# Altium PCB PCB_SCore-SR1_2024-11-10.pcbdoc
Units mil, origin at the board's own origin, x right, y up, seen from the top; angles counter-clockwise.
Board outline 2600 x 4099.99 mil, 2 copper layers (Top Layer, Bottom Layer); 87 components, 61 nets, 332 pads, 237 vias.
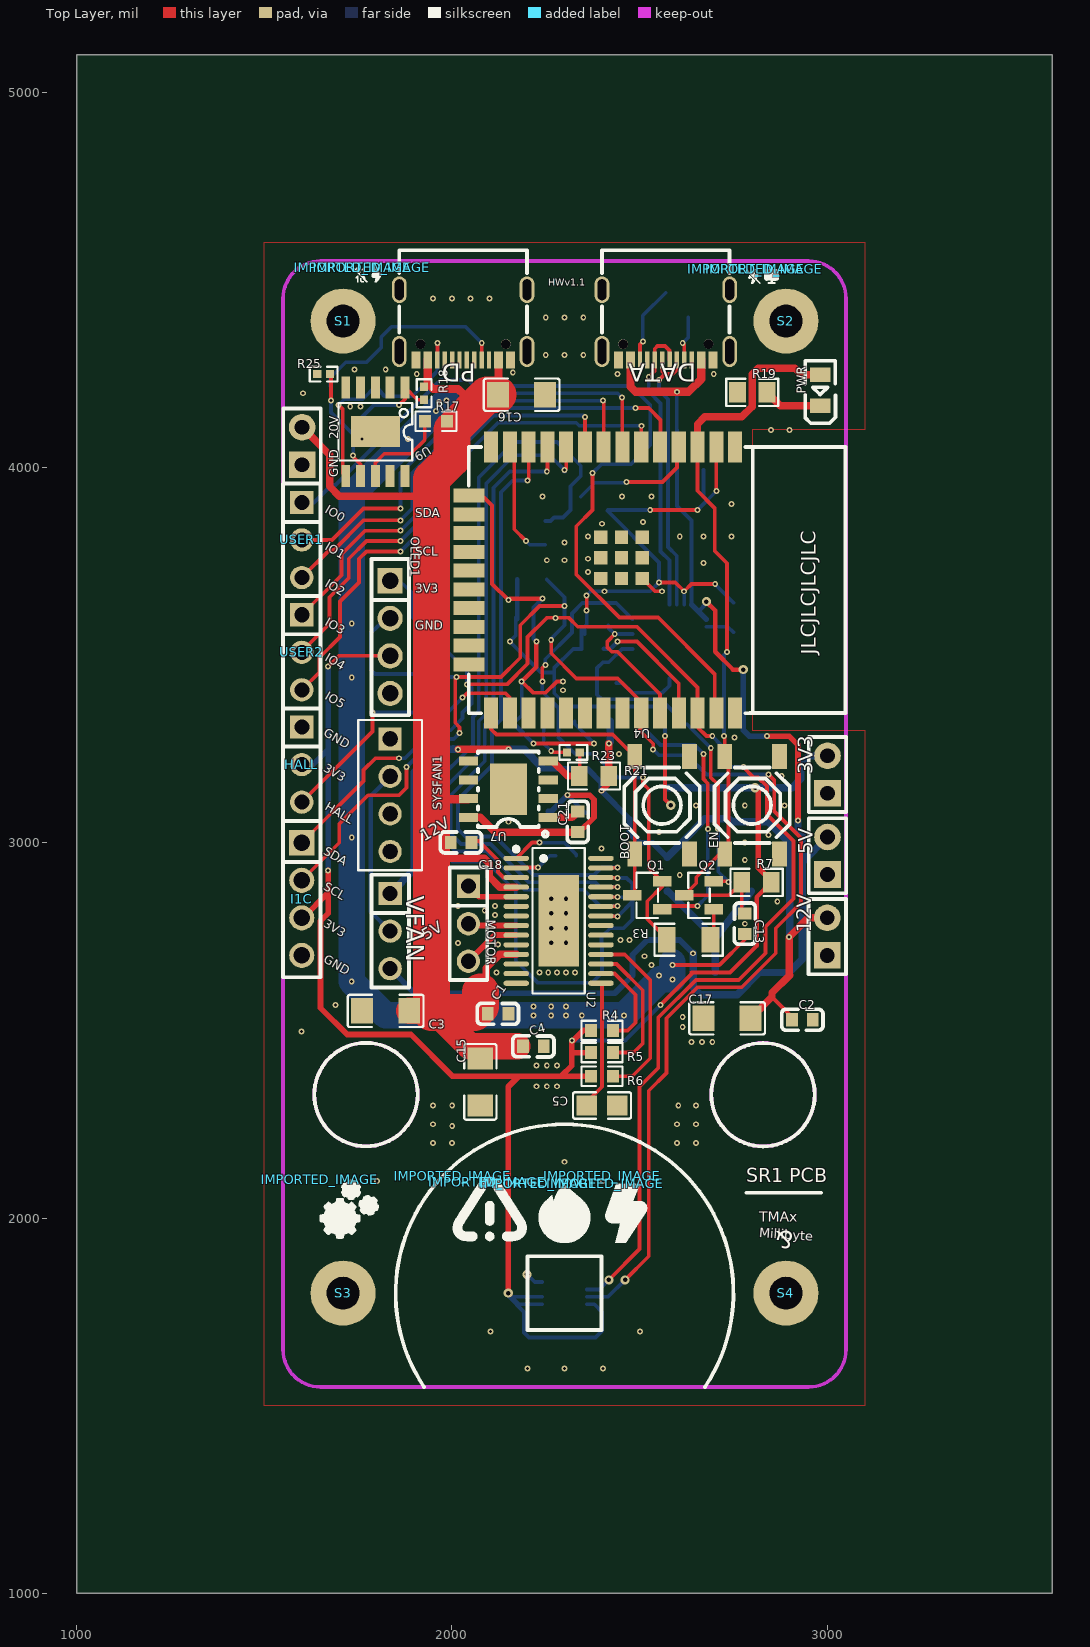
[diagram p0: Top Layer view]
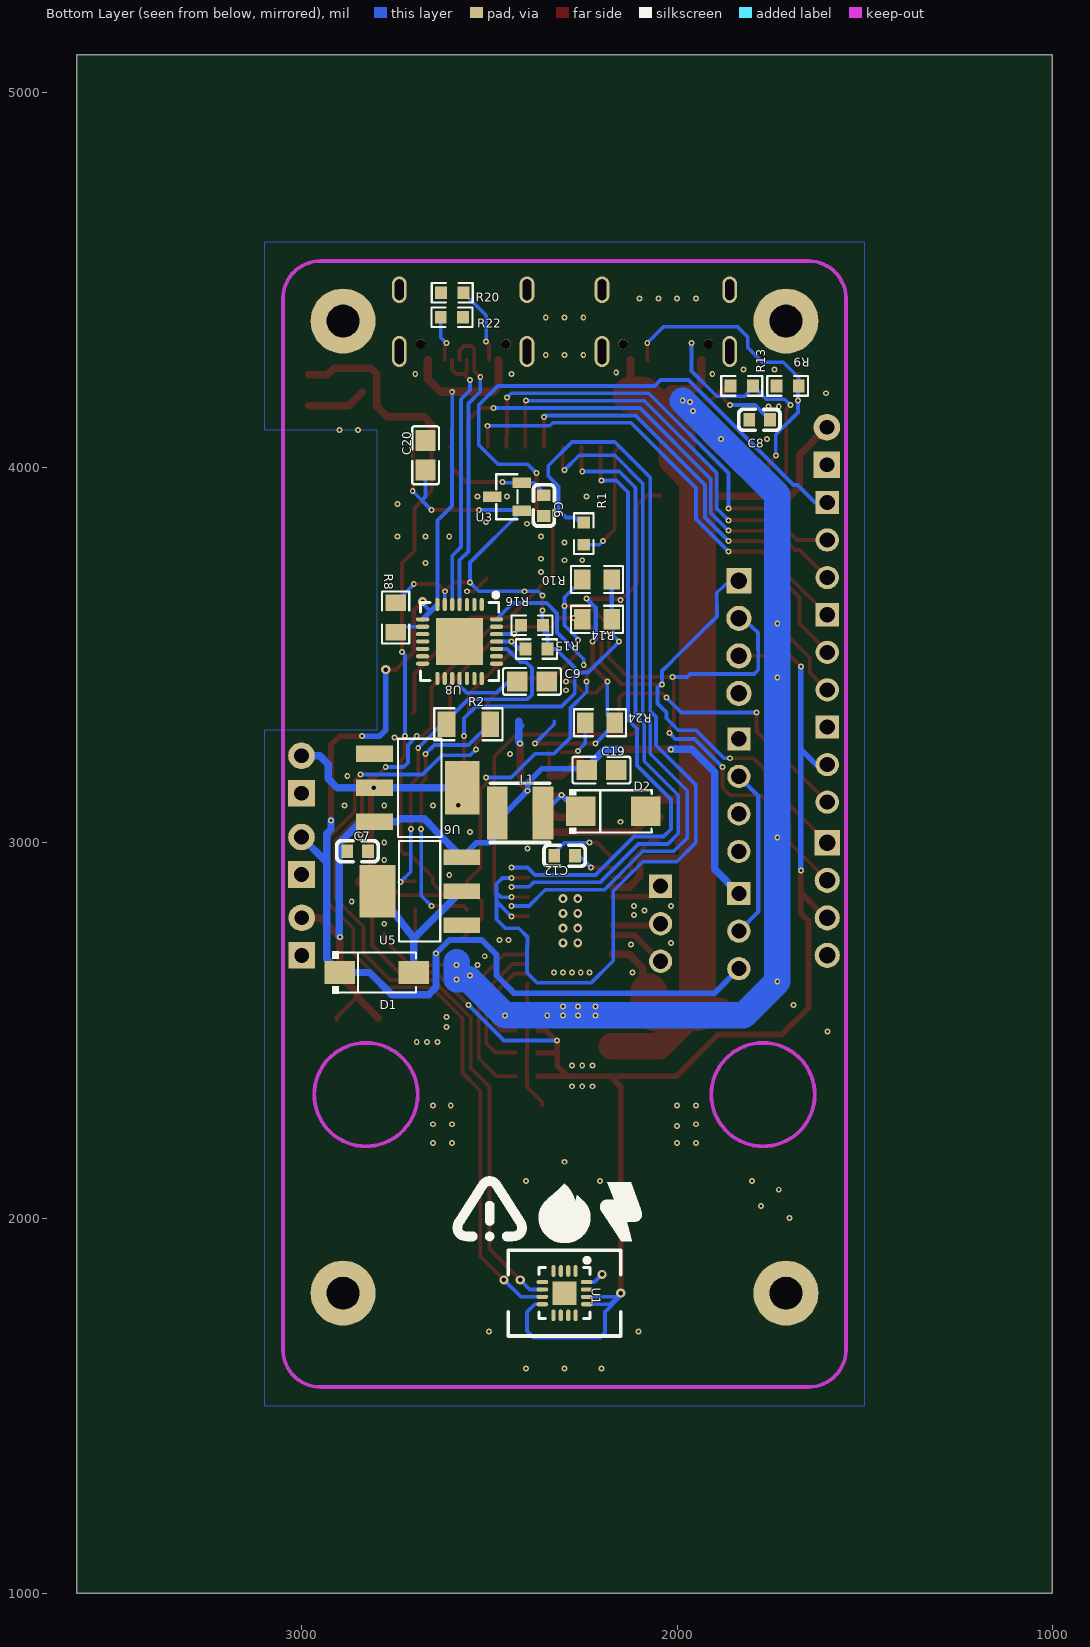
[diagram p1: Bottom Layer view, seen from below]

## Layer stack, top to bottom
Top Layer: signal copper (thickness not stored)
Dielectric: dielectric 12.6, FR-4, Dk 4.8
Bottom Layer: signal copper (thickness not stored)

## Board outline
3600,1000 1000,1000 1000,5099.99 3600,5099.99

## Components (designator, comment, footprint, x,y, rotation, side; value= is the part's Value field where it differs from the comment)
3V3 "3-103336-4" HDR-TH_2P-P2.54-V-M-1 3000.78,3181.89 r90 top
5V "3-103336-4" HDR-TH_2P-P2.54-V-M-1 3000.78,2965.35 r90 top
12V "3-103336-4" HDR-TH_2P-P2.54-V-M-1 3000,2750 r90 top
20V "3-103336-4" HDR-TH_2P-P2.54-V-M-1 1600.8,4057.09 r90 top
BOOT "TS-1187A-B-A-B" SW-SMD_4P-L5.1-W5.1-P3.70-LS6.5-TL-2 2559.84,3100 r90 top
C1 "100nF" C0603#1 2122.83,2544.09 r0 top
C2 "100nF" C0603#1 2933.86,2528.34 r0 top
C3 "100uF" C1206 1823.62,2551.97 r0 top
C4 "1uF" C0603#1 2217.32,2457.48 r0 top
C5 "470nF" C0805#1 2400,2300 r180 top
C6 "100nF" C0603#2 2355.12,3898.42 r90 bottom
C7 "1uF" C0603#2 2851.18,2977.16 r0 bottom
C8 "1uF" C0603#2 1780.31,4126.77 r0 bottom
C9 "4.7uF" C0805#2 2386.61,3429.92 r0 bottom
C12 "100nF" C0603#2 2300,2965.35 r180 bottom
C13 "1uF" C0603#1 2780.31,2784.25 r270 top
C15 "10uF" C1206 2075.59,2362.99 r90 top
C16 "100uF" C1206 2185.82,4193.69 r180 top
C17 "100uF" C1206 2733.07,2532.28 r0 top
C18 "100nF" C0603#1 2024.41,3000.78 r0 top
C19 "4.7uF" C0805#2 2201.57,3193.7 r0 bottom
C20 "4.7uF" C0805#2 2670.08,4032.28 r270 bottom
C21 "100nF" C0603#1 2335.43,3055.9 r90 top
D1 "SS54_C22452" SMA_L4.4-W2.8-LS5.4-R-RD 2800,2654.33 r0 bottom
D2 "SS34" SMA_L4.3-W2.6-LS5.2-RD 2170.08,3083.46 r0 bottom
DATA "HC-TYPE-C-16P-3M2S" USB-C-SMD_HC-TYPE-C-16P-026W 2570,4380 r180 top
EN "TS-1187A-B-A-B" SW-SMD_4P-L5.1-W5.1-P3.70-LS6.5-TL-2 2800,3100 r90 top
HALL "PM2.54-1*3" HDR-TH_3P-P2.54-V-F 1600.01,3208.28 r270 top
I1C "DM254R-11-04-85" HDR-TH_4P-P2.54-V-F 1600,2850 r270 top
IMPORTED_IMAGE "IMPORTED_IMAGE" IMPORTED_IMAGE 2002.27,2111.09 r0 top
IMPORTED_IMAGE "IMPORTED_IMAGE" IMPORTED_IMAGE 2408.57,2091.49 r0 top
IMPORTED_IMAGE "IMPORTED_IMAGE" IMPORTED_IMAGE 2231.01,2091.34 r0 top
IMPORTED_IMAGE "IMPORTED_IMAGE" IMPORTED_IMAGE 2783.58,4528.36 r0 top
IMPORTED_IMAGE "IMPORTED_IMAGE" IMPORTED_IMAGE 1786.08,4532.28 r0 top
IMPORTED_IMAGE "IMPORTED_IMAGE" IMPORTED_IMAGE 2832.06,4528.24 r0 top
IMPORTED_IMAGE "IMPORTED_IMAGE" IMPORTED_IMAGE 1735.74,4532.3 r0 top
IMPORTED_IMAGE "IMPORTED_IMAGE" IMPORTED_IMAGE 1647.72,2102.59 r0 top
IMPORTED_IMAGE "IMPORTED_IMAGE" IMPORTED_IMAGE 2400.88,2111.09 r0 top
IMPORTED_IMAGE "IMPORTED_IMAGE" IMPORTED_IMAGE 2231.01,2091.34 r0 top
IMPORTED_IMAGE "IMPORTED_IMAGE" IMPORTED_IMAGE 2093.61,2095.43 r0 top
L1 "22uH" IND-SMD_L4.0-W4.0_PRS4018 2418.11,3079.52 r0 bottom
MOTOR "PM2.54-1*3" HDR-TH_3P-P2.54-V-F 2044.09,2784.25 r270 top
OLED1 "0.96OLED_4P" HDR-TH_4P-P2.54-V-F-3 1835.43,3548.03 r270 top
PD "HC-TYPE-C-16P-3M2S" USB-C-SMD_HC-TYPE-C-16P-026W 2030,4380 r180 top
PWR "0805G (Green)" LED0805-R-RD 2981.1,4205.51 r90 top
Q1 "SS8050_C2150" SOT-23-3_L2.9-W1.3-P1.90-LS2.4-BR#1 2520.47,2859.84 r0 top
Q2 "SS8050_C2150" SOT-23-3_L2.9-W1.3-P1.90-LS2.4-BR#1 2658.26,2859.84 r0 top
R1 "10kΩ" R0603#1 2248.82,3823.62 r270 bottom
R2 "10kΩ" R1206#1 2555.9,3315.74 r0 bottom
R3 "10kΩ" R1206#2 2630.71,2741.73 r180 top
R4 "10kΩ" R0603#2 2400,2500 r0 top
R5 "10kΩ" R0603#2 2400,2440.94 r0 top
R6 "10kΩ" R0603#2 2400,2377.95 r0 top
R7 "4.7kΩ" R0805#1 2811.81,2894.49 r0 top
R8 "4.7kΩ" R0805#2 2750,3599.99 r90 bottom
R9 "5.1kΩ" R0603#1 1705.51,4217.32 r180 bottom
R10 "4.7kΩ" R0805#2 2213.38,3701.57 r180 bottom
R13 "5.1kΩ" R0603#1 1827.56,4217.32 r180 bottom
R14 "4.7kΩ" R0805#2 2213.38,3595.27 r180 bottom
R15 "10kΩ" R0603#1 2374.8,3516.53 r180 bottom
R16 "10kΩ" R0603#1 2386.61,3579.52 r180 bottom
R17 "10kΩ" R0603#2 1957.48,4122.83 r0 top
R18 "1kΩ" R0402 1925.98,4197.63 r90 top
R19 "330Ω" R0805#1 2800,4199.99 r0 top
R20 "5.1kΩ" R0603#1 2599.21,4465.35 r0 bottom
R21 "10kΩ" R0805#1 2378.74,3177.95 r0 top
R22 "5.1kΩ" R0603#1 2600,4399.99 r0 bottom
R23 "1kΩ" R0402 2323.62,3240.94 r0 top
R24 "120Ω" R0805#2 2205.51,3319.68 r180 bottom
R25 "1kΩ" R0402 1658.27,4248.81 r0 top
S1 "M2 Mounting Screw" MOUNTINGHOLE_2.2MM_M2_PAD 1710,4390 r0 top
S2 "M2 Mounting Screw" MOUNTINGHOLE_2.2MM_M2_PAD 2890,4390 r0 top
S3 "M2 Mounting Screw" MOUNTINGHOLE_2.2MM_M2_PAD 1710,1800 r0 top
S4 "M2 Mounting Screw" MOUNTINGHOLE_2.2MM_M2_PAD 2890,1800 r0 top
SYSFAN1 "molex 4p" MOLEX---47053-1000_MOLEX 1835.43,3126.77 r180 top
U1 "MT6701QT-STD" QFN-16_L3.0-W3.0-P0.50-TL-EP 2300,1800 r90 bottom
U2 "DRV8313PWPR" HTSSOP-28_L9.8-W4.5-P0.65-LS6.6-BL-EP 2284.25,2792.12 r270 top
U3 "TMP236A4DBZR" SOT-23-3_L2.9-W1.3-P1.90-LS2.4-BR#2 2453.54,3922.04 r0 bottom
U4 "ESP32-WROOM-32E(4MB)" WIFI-SMD_ESP32-WROOM-32E 2400,3699.99 r180 top
U5 "AMS1117-5.0" SOT-223_L6.5-W3.5-P2.30-LS7.0-BR 2685.82,2870.86 r0 bottom
U6 "AMS1117-3.3" SOT-223-3_L6.5-W3.4-P2.30-LS7.0-BR 2689.76,3146.45 r180 bottom
U7 "TPS5430DDAR" ESOP-8_L4.9-W3.9-P1.27-LS6.0-TL-EP 2150.39,3142.52 r180 top
U8 "CP2102-GMR" WQFN-28_L5.0-W5.0-P0.50-BL-EP3.2 2579.53,3536.22 r180 bottom
U9 "CH224K" ESSOP-10_L4.9-W3.9-P1.0-LS6.0-TL-EP 1796.06,4095.27 r180 top
USER1 "PM2.54-1*3" HDR-TH_3P-P2.54-V-F 1600.01,3806.7 r270 top
USER2 "PM2.54-1*3" HDR-TH_3P-P2.54-V-F 1600.01,3507.49 r270 top
VFAN "PM2.54-1*3" HDR-TH_3P-P2.54-V-F 1835.43,2764.56 r270 top

## Footprints (in the part's own frame and the unit in brackets; to place one, negate y for a bottom-side part, rotate by r counter-clockwise, add the part's x,y. Pads: shape width x height; smd on the part's side, far side on the other; paste and mask are expansions set on the pad)
C0603#1 [mm]
  rect 0.8x0.9 smd paste+0 mask+0.051: 1(-0.7,0) 2(0.7,0)
  silkscreen extent -1.41,-0.71 1.39,0.72
C0603#2 [mm]
  rect 0.8x0.9 smd paste+0 mask+0.051: 1(0.7,0) 2(-0.7,0)
  silkscreen extent -1.39,-0.72 1.41,0.71
C0805#1 [mm]
  rect 1.41x1.35 smd paste+0 mask+0.051: 1(-1.03,0) 2(1.03,0)
  silkscreen extent -1.96,-0.9 1.96,0.9
C0805#2 [mm]
  rect 1.41x1.35 smd paste-100 mask+0.051: 1(1,0) 2(-1,0)
  silkscreen extent -1.96,-0.9 1.96,0.9
C1206 [mm]
  rect 1.485x1.728 smd paste-100 mask+0.051: 1(-1.593,0) 2(1.593,0)
  silkscreen extent -2.56,-1.09 2.56,1.09
ESOP-8_L4.9-W3.9-P1.27-LS6.0-TL-EP [mm]
  rect 1.3x0.6 smd paste+0 mask+0.051: 1(-2.7,1.905) 2(-2.7,0.635) 3(-2.7,-0.635) 4(-2.7,-1.905) 5(2.7,-1.905) 6(2.7,-0.635) 7(2.7,0.635) 8(2.7,1.905)
  rect 2.5x3.5 smd paste+0 mask+0.051: 9(0,0)
  silkscreen extent -2.67,-2.55 2.05,3.2
ESSOP-10_L4.9-W3.9-P1.0-LS6.0-TL-EP [mm]
  rect 0.6x1.5 smd paste+0 mask+0.05: 1(-2,-3) 2(-1,-3) 3(0,-3) 4(1,-3) 5(2,-3) 6(2,3) 7(1,3) 8(0,3) 9(-1,3) 10(-2,3)
  rect 3.3x2.1 smd paste+0 mask+0.05: 11(0,0)
  silkscreen extent -2.5,-1.95 2.5,1.95
HDR-TH_2P-P2.54-V-M-1 [mm]
  rect 1.8x1.8 hole 1 paste+0 mask+0.051: 1(-1.27,0)
  round 1.8 hole 1 paste+0 mask+0.051: 2(1.27,0)
  silkscreen extent -2.54,-1.27 2.54,1.27
HDR-TH_3P-P2.54-V-F [mil]
  rect 62x62 hole 40.16 paste+0 mask+2: 1(-100,0)
  round 62 hole 40.16 paste+0 mask+2: 2(0,0) 3(100,0)
  silkscreen extent -150,-50 150,50
HDR-TH_4P-P2.54-V-F [mm]
  rect 1.7x1.7 hole 1.1 paste+0 mask+0.051: 1(-3.81,0)
  round 1.7 hole 1.1 paste+0 mask+0.051: 2(-1.27,0) 3(1.27,0) 4(3.81,0)
  silkscreen extent -5.29,-1.27 5.29,1.27
HDR-TH_4P-P2.54-V-F-3 [mm]
  rect 1.7x1.7 hole 1.1 paste+0 mask+0.051: 1(-3.81,0)
  round 1.7 hole 1.1 paste+0 mask+0.051: 2(-1.27,0) 3(1.27,0) 4(3.81,0)
  silkscreen extent -5.29,-1.27 5.29,1.27
HTSSOP-28_L9.8-W4.5-P0.65-LS6.6-BL-EP [mm]
  oval 0.343x1.731 smd paste+0 mask+0.051: 1(-4.225,-2.866) 2(-3.575,-2.866) 3(-2.925,-2.866) 4(-2.275,-2.866) 5(-1.625,-2.866) 6(-0.975,-2.866) 7(-0.325,-2.866) 8(0.325,-2.866) 9(0.975,-2.866) 10(1.625,-2.866) 11(2.275,-2.866) 12(2.925,-2.866) 13(3.575,-2.866) 14(4.225,-2.866) 15(4.225,2.866) 16(3.575,2.866) 17(2.925,2.866) 18(2.275,2.866) 19(1.625,2.866) 20(0.975,2.866) 21(0.325,2.866) 22(-0.325,2.866) 23(-0.975,2.866) 24(-1.625,2.866) 25(-2.275,2.866) 26(-2.925,2.866) 27(-3.575,2.866) 28(-4.225,2.866)
  rect 6.2x2.75 smd paste+0 mask+0.051: 29(0,0)
  silkscreen extent -5,-3.02 4.93,1.77
IMPORTED_IMAGE [mil]
  silkscreen extent 0,-172 197,0
IND-SMD_L4.0-W4.0_PRS4018 [mil]
  rect 55.12x141.73 smd paste+0 mask+2: 1(61,0) 2(-61,0)
  silkscreen extent -79,-79 79,79
LED0805-R-RD [mm]
  rect 1x1.4 smd paste+0 mask+0.051: 1(1.05,0) 2(-1.05,0)
  silkscreen extent -2.22,-1.04 1.99,1.01
MOLEX---47053-1000_MOLEX [mil]
  rect 61.81x61.81 hole 40.16 slot 40.36 at 0 deg paste+0 mask+2: 1(0,-150)
  round 61.81 hole 40.16 slot 40.36 at 0 deg paste+0 mask+2: 2(0,-50) 3(0,50) 4(0,150)
  silkscreen extent -85,-200 85,200
MOUNTINGHOLE_2.2MM_M2_PAD [mm]
  round 4.4 hole 2.2 slot 2.205 at 0 deg paste+0 mask+0.102: 1(0,0)
QFN-16_L3.0-W3.0-P0.50-TL-EP [mm]
  oval 0.8x0.28 smd paste+0 mask+0.051: 1(1.5,-0.75) 2(1.5,-0.25) 3(1.5,0.25) 4(1.5,0.75) 9(-1.5,0.75) 10(-1.5,0.25) 11(-1.5,-0.25) 12(-1.5,-0.75)
  oval 0.28x0.8 smd paste+0 mask+0.051: 5(0.75,1.5) 6(0.25,1.5) 7(-0.25,1.5) 8(-0.75,1.5) 13(-0.75,-1.5) 14(-0.25,-1.5) 15(0.25,-1.5) 16(0.75,-1.5)
  rect 1.6x1.6 smd paste+0 mask+0.051: 17(0,0)
  silkscreen extent -1.72,-1.72 2.38,1.72
R0402 [mm]
  rect 0.566x0.54 smd paste-100 mask+0.051: 1(-0.433,0) 2(0.433,0)
  silkscreen extent -0.94,-0.5 0.94,0.5
R0603#1 [mil]
  rect 31.75x34.02 smd paste-3937.01 mask+2: 1(29.66,0) 2(-29.65,0)
  silkscreen extent -55,-26 55,26
R0603#2 [mil]
  rect 31.75x34.02 smd paste-3937.01 mask+2: 1(-29.66,0) 2(29.65,0)
  silkscreen extent -55,-26 55,26
R0805#1 [mil]
  rect 44.59x54.21 smd paste-3937.01 mask+2: 1(-39.37,0) 2(39.37,0)
  silkscreen extent -69,-36 69,36
R0805#2 [mil]
  rect 44.59x54.21 smd paste-3937.01 mask+2: 1(39.37,0) 2(-39.37,0)
  silkscreen extent -69,-36 69,36
R1206#1 [mil]
  rect 47.54x66.97 smd paste-3937.01 mask+2: 1(58.22,0) 2(-58.22,0)
  silkscreen extent -91,-42 91,42
R1206#2 [mil]
  rect 47.54x66.97 smd paste-3937.01 mask+2: 1(-58.22,0) 2(58.22,0)
  silkscreen extent -91,-42 91,42
SMA_L4.3-W2.6-LS5.2-RD [mm]
  rect 2x2 smd paste+0 mask+0.051: 1(2.2,0) 2(-2.2,0)
  silkscreen extent -2.6,-1.5 2.98,1.5
SMA_L4.4-W2.8-LS5.4-R-RD [mil]
  rect 81.2x60.59 smd paste+0 mask+2: 1(-98.57,0) 2(98.57,0)
  silkscreen extent -104,-56 119,56
SOT-23-3_L2.9-W1.3-P1.90-LS2.4-BR#1 [mm]
  rect 1.25x0.7 smd paste+0 mask+0.051: 1(1,-0.95) 2(1,0.95) 3(-1,0)
  silkscreen extent -0.73,-1.53 0.73,1.53
SOT-23-3_L2.9-W1.3-P1.90-LS2.4-BR#2 [mm]
  rect 1.25x0.7 smd paste+0 mask+0.051: 1(-1,0.95) 2(-1,-0.95) 3(1,0)
  silkscreen extent -0.73,-1.53 0.73,1.53
SOT-223-3_L6.5-W3.4-P2.30-LS7.0-BR [mm]
  rect 2.5x1.1 smd paste+0 mask+0.051: 1(-2.97,2.3) 2(-2.97,0) 3(-2.97,-2.3)
  rect 2.34x3.6 smd paste+0 mask+0.051: 4(2.97,0)
  silkscreen extent -1.37,-3.33 1.57,3.33
SOT-223_L6.5-W3.5-P2.30-LS7.0-BR [mm]
  rect 2.465x1.05 smd paste+0 mask+0.051: 1(-2.857,2.3) 2(-2.857,0) 3(-2.857,-2.3)
  rect 2.465x3.54 smd paste+0 mask+0.051: 4(2.857,0)
  silkscreen extent -1.4,-3.4 1.4,3.4
SW-SMD_4P-L5.1-W5.1-P3.70-LS6.5-TL-2 [mm]
  rect 1.7x1 smd paste+0 mask+0.051: 1(-3.3,1.85) 2(3.3,1.85) 3(-3.3,-1.85) 4(3.3,-1.85)
  silkscreen extent -2.55,-2.55 2.55,2.55
USB-C-SMD_HC-TYPE-C-16P-026W [mm]
  oval 1x2.1 hole 0.6 slot 1.7 at 90 deg paste+0 mask+0.051: 12(-4.32,1.805) 13(4.32,1.805)
  oval 1x1.8 hole 0.6 slot 1.4 at 90 deg paste+0 mask+0.051: 14(-4.32,-2.375) 15(4.32,-2.375)
  rect 0.6x1.14 smd paste-100 mask+0.05: A1B12(-3.2,2.375) A4B9(-2.4,2.375) A9B4(2.4,2.375) A12B1(3.2,2.375)
  rect 0.3x1.14 smd paste-100 mask+0.05: A5(-1.25,2.375) A6(-0.25,2.375) A7(0.25,2.375) A8(1.25,2.375) B5(1.75,2.375) B6(0.75,2.375) B7(-0.75,2.375) B8(-1.75,2.375)
  round 0.65 hole 0.65 unplated paste+0: ""(-2.89,1.305) ""(2.89,1.305)
  silkscreen extent -4.32,-5.04 4.32,0.52
WIFI-SMD_ESP32-WROOM-32E [mm]
  rect 0.95x2.1 smd paste+0 mask+0.051: 1(-9.002,-9) 2(-7.732,-9) 3(-6.462,-9) 4(-5.192,-9) 5(-3.922,-9) 6(-2.652,-9) 7(-1.382,-9) 8(-0.112,-9) 9(1.158,-9) 10(2.428,-9) 11(3.698,-9) 12(4.968,-9) 13(6.238,-9) 14(7.508,-9) 25(7.507,9) 26(6.237,9) 27(4.967,9) 28(3.697,9) 29(2.427,9) 30(1.157,9) 31(-0.113,9) 32(-1.383,9) 33(-2.653,9) 34(-3.923,9) 35(-5.193,9) 36(-6.463,9) 37(-7.733,9) 38(-9.003,9)
  rect 2.1x0.95 smd paste+0 mask+0.051: 15(9.002,-5.715) 16(9.002,-4.445) 17(9.002,-3.175) 18(9.002,-1.905) 19(9.002,-0.635) 20(9.002,0.635) 21(9.002,1.905) 22(9.002,3.175) 23(9.002,4.445) 24(9.002,5.715)
  rect 0.9x0.9 smd paste+0 mask+0.051: 39(-2.721,-0.1) 39(-2.721,-2.9) 39(-2.721,-1.5) 39(-1.322,-0.1) 39(-1.322,-2.9) 39(-1.321,-1.5) 39(0.079,-0.1) 39(0.079,-1.5) 39(0.079,-2.9)
  silkscreen extent -16.48,-9 9.02,9.02
WQFN-28_L5.0-W5.0-P0.50-BL-EP3.2 [mm]
  oval 0.28x0.9 smd paste-100 mask+0.051: 1(1.501,2.5) 2(1.001,2.5) 3(0.501,2.5) 4(0,2.5) 5(-0.5,2.5) 6(-1.001,2.5) 7(-1.501,2.5) 15(-1.501,-2.5) 16(-1.001,-2.5) 17(-0.5,-2.5) 18(0,-2.5) 19(0.501,-2.5) 20(1.001,-2.5) 21(1.501,-2.5)
  oval 0.9x0.28 smd paste-100 mask+0.051: 8(-2.5,1.501) 9(-2.5,1.001) 10(-2.5,0.5) 11(-2.5,0) 12(-2.5,-0.5) 13(-2.5,-1.001) 14(-2.5,-1.501) 22(2.5,-1.501) 23(2.5,-1.001) 24(2.5,-0.5) 25(2.5,0) 26(2.5,0.5) 27(2.5,1.001) 28(2.5,1.501)
  rect 3.2x3.2 smd paste-100 mask+0.051: 29(0,0)
  silkscreen extent -2.65,-2.65 2.65,3.3

## Via types
v1: diameter 15.75, hole 7.87, Top Layer to Bottom Layer, tented both sides, 221 vias
v2: diameter 23.62, hole 11.81, Top Layer to Bottom Layer, tented both sides, 8 vias
v3: diameter 24.41, hole 12.2, Top Layer to Bottom Layer, tented both sides, 8 vias

## Nets (pads, with @x,y where several pads share a name; then routed paths per layer and width w, separated by ;. In a path a pad name is that pad's centre, name@x,y a point inside that pad or via, vN(x,y) a via of type N, cw(c..) or ccw(c..) an arc to the next point about the centre after c; other vN are vias at no path point)
3V3: 3V3.2 C20.1 HALL.2 I1C.3 OLED1.3 R4.1 R5.1 R6.1 R7.2 R8.1 R10.1 R14.1 R15.1 R16.1 U1.8 U1.13 U1.14 U3.1 U4.2 U6.2 U6.4 U8.6 | length 7556.5
  Top Layer w10: v1(1670.08,3469.29) 1698.82,3498.03 OLED1.3 ; v1(2359.06,3618.89) v1(2359.06,3658.26) ; v1(2528.35,3886.61) v1(2654.33,3886.61) ; v1(2551.97,3693.7) 2595.27,3693.7 v1(2618.9,3670.07) 2638.58,3689.76 v1(2701.57,3689.76) ; v1(2567.72,3284.25) 2567.72,3115.35 v3(2583.07,3100) ; v1(2704.43,3936.71) U4.2
  Top Layer w11.81: v1(2555.91,2567.71) 2642.51,2654.32 ; 2638.58,2654.33 2740.94,2654.33 2811.81,2725.19 2811.81,2855.11 R7.2
  Top Layer w15: I1C.3 1603.2,2800 1670.1,2866.9 ; v1(1670.08,2925.98) 1670.08,2866.93 ; 1721.2,2489 1650,2560.2 1650,2791.7 1670.1,2811.8 1670.1,2866.9 ; 1721.26,2488.97 1890.6,2489 2000.8,2378.7 2178,2377.9 ; v3(2150,1800) 2150,2350 2177.95,2377.95 R6.1@2370.34,2377.95 ; 2291.1,2377.9 2319.7,2406.3 2319.7,2469.7 2350,2500 R4.1 ; 2319.7,2440.94 R5.1 ; v3(2807.87,3146.45) 2815.74,3138.57 2815.74,2933.85 2851.18,2898.42 R7.2
  Bottom Layer w10: R14.1@2170.3,3600 2170.3,3552.19 v1(2154.33,3536.22) 2237.05,3453.5 2272.4,3453.5 ; R14.1@2170.34,3600 2174.02,3596.32 R14.1 ; U1.13 2179.53,1770.47 v3(2150,1800) ; U1.14 2159.84,1790.16 v3(2150,1800) ; 2353.8,3555.9 2353.8,3576.37 R16.1@2356.95,3579.52 ; U1.8 2379.53,1770.47 2400,1750 2400,1700 2400,1699.21 2382.68,1681.89 2217.32,1681.89 2214.6,1681.9 2205.5,1681.9 2192.2,1695.2 2192.2,1750 2150,1792.2 v3(2150,1800) ; v1(2359.06,3618.89) 2359.06,3581.63 R16.1@2356.95,3579.52 ; v1(2359.06,3658.26) 2359.06,3659.06 2370.07,3670.07 v1(2406.3,3670.07) ; v1(2406.3,3670.07) 2528.37,3670.07 v1(2551.97,3693.7) ; v1(2528.35,3886.61) 2416.13,3886.61 U3.1 2551.97,3746.85 v1(2551.97,3693.7) ; v1@2567.7,3284.3 2567.7,3331.5 2536.2,3363 2307.9,3363 2272.4,3398.4 2272.4,3465.4 2323.53,3516.53 R15.1 2345.14,3567.71 R16.1@2356.95,3579.52 ; U8.6 v1(2618.9,3670.07) ; v1(2654.33,3886.61) v1(2704.43,3936.71) ; C20.1 2670.08,3922.3 2680.05,3912.33 ; v1(2701.57,3689.76) 2701.57,3687.79 R8.1 2740.82,3648.55 R8.1@2737.01,3648.55
  Bottom Layer w11.81: R14.1 R10.1 ; v1(2319.69,2473.23) 2359.05,2473.23 2461.41,2473.23 v1(2555.91,2567.71)
  Bottom Layer w15: HALL.2 1629.5,3208.3 1670.1,3248.8 ; v1(1670.08,2925.98) 1670.08,3006.5 1670.08,3088 1670.08,3205.51 1670.1,3248.8 ; v1(1670.08,3469.29) 1670.08,3323.62 1670.1,3248.8
  Bottom Layer w19.68: U6.4 U6.2@2807.86,3146.46 ; U6.2 2906.3,3146.5 2929.9,3170.1 2929.9,3209.4 2952.4,3231.9 3V3.2
5V: 5V.2 D1.2 DATA.A4B9 DATA.A9B4 U8.7 U8.8 VFAN.3 | length 3605.8
  Top Layer w11.81: v3@2677.95,3642.51 2701.57,3618.89 2701.57,3508.66 2748.82,3461.41 v3(2776.38,3461.41)
  Top Layer w15: v1(2839.37,3284.25) 2898.42,3284.25 2922.04,3260.63 v1(2922.05,3059.84)
  Top Layer w21.65: DATA.A9B4 2475.51,4215.03 2488.97,4201.57 2630.71,4201.57 2664.49,4235.35 DATA.A4B9
  Bottom Layer w10: v1(2599.21,4201.57) 2599.21,4100.79 2600,4100 2600,3897.6 2638.6,3859 U8.7
  Bottom Layer w11.81: 2656.76,3616.44 2677.95,3637.63 v3@2677.95,3642.51
  Bottom Layer w14.96: v3(2776.38,3461.41) 2776.4,3300 2792.1,3284.2 v1(2839.37,3284.25)
  Bottom Layer w15: VFAN.3 1900.8,2599.2 2433.9,2599.2 2481.1,2646.5 2481.1,2701.6 2520.5,2740.9 2607.1,2740.9 v1(2642.52,2705.51) ; U8.7 U8.8
  Bottom Layer w19.68: v1(2642.52,2705.51) 2642.52,2614.96 2662.2,2595.27 2760.63,2595.27 2819.68,2654.32 D1.2 2933.86,2689.61 2933.86,2714.71 2933.86,2948.41 ; v1(2922.05,3059.84) 2922.04,3036.22 2933.86,3024.41 2933.86,2948.41 ; 5V.2@3000.79,3015.35 2933.86,2948.41
  other v3: 2677.95,3642.52
12V: 12V.2 C2.1 C7.1 C17.2 C19.1 L1.1 R21.2 U5.3 U6.3 VFAN.1 | length 2600.9
  Top Layer w11.81: 2852.76,2589.28 2906.3,2535.74 C2.1
  Top Layer w15: v1(2398.43,3138.58) 2418.11,3158.26 R21.2
  Top Layer w19.68: v1(2016.54,3248.82) v1(2150.39,3248.82) ; R21.2 v1(2418.1,3264.6) ; C17.2 2852.76,2589.28 2852.76,2600 ; 2900,2647.24 2852.76,2600 ; 12V.2 2949.6,2800 v1(2898.42,2748.82) 2898.42,2645.66 2852.76,2600
  Bottom Layer w15: C19.1@2240.94,3197.63 2360.44,3197.63 2398.42,3159.65 v1(2398.43,3138.58) 2473.2,3063.8 2473.2,3023.2 2500.78,3000.78 2534.8,3000 U5.3 ; 2414.18,3311.72 2422.05,3319.59 2422.05,3323.62
  Bottom Layer w19.68: VFAN.1 1900,2929.1 1900,3187.4 1961.4,3248.8 v1(2016.54,3248.82) ; 2003.74,3249.99 2004.92,3248.82 v1(2016.54,3248.82) ; v1(2150.39,3248.82) 2192.37,3248.82 C19.1@2239.61,3201.57 ; v1(2418.1,3264.6) 2422.05,3268.55 2422.05,3323.62 ; U5.3 2646.45,3034.54 2646.45,3036.22 2674.01,3063.78 2733.07,3063.78 2737.01,3063.78 2748.81,3055.91 U6.3 2843.3,3055.9 2900,2999.2 2900,2750.4 v1(2898.42,2748.82)
BOOT: BOOT.1 BOOT.2 Q1.3 U4.25 | length 828.2
  Top Layer w10: U4.25 2104.43,3302.65 2118.9,3288.18 2428.73,3288.18 BOOT.2 BOOT.1 2487,2865.74 Q1.3
CC1: PD.A5 R9.1 R25.2 U9.7 | length 906.2
  Top Layer w10: R25.2 1677.95,4246.16 v1@1677.95,4177.95 ; v1(1737.01,4032.28) 1737.01,4028.34 1756.69,4008.66 U9.7 ; PD.A5 2079.53,4286.82 v1(2079.53,4331.49)
  Bottom Layer w10: R9.1 1677.95,4215.23 1677.95,4146.45 1737.01,4087.39 v1(1737.01,4032.28) ; R9.1 1675.9,4238.8 1717.3,4280.3 1772.4,4280.3 1811.8,4319.7 1811.8,4347.2 1839.4,4374.8 2036.2,4374.8 v1(2079.53,4331.49)
  other v1: 1677.95,4177.95
CC2: PD.B5 R13.1 U9.6 | length 643
  Top Layer w10: v1(1697.64,4166.14) 1709.45,4154.33 1709.45,3985.04 U9.6 ; PD.B5 v1(1961.4,4331.5)
  Bottom Layer w10: v1(1697.64,4166.14) 1713.38,4181.88 1762.5,4181.9 R13.1 1819.68,4189.76 1894.5,4189.8 1961.4,4256.7 v1(1961.4,4331.5)
CPRST: R8.2 U8.9 | length 78.3
  Bottom Layer w10: U8.9 2735,3575.62 R8.2
DATA_A5: DATA.A5 R22.1 | length 121.3
  Top Layer w10: v1(2614.96,4331.49) 2619.2,4327.25 DATA.A5
  Bottom Layer w10: v1(2614.96,4331.49) 2629.65,4346.18 R22.1@2629.65,4399.99
DATA_B5: DATA.B5 R20.2 | length 207.2
  Top Layer w10: DATA.B5 2501.09,4327.86 v1(2508.66,4335.43)
  Bottom Layer w10: v1(2508.66,4335.43) 2508.66,4404.45 R20.2
DM: DATA.A7 DATA.B7 U8.5 | length 743.5
  Top Layer w10: v1(2551.97,4233.07) 2567.71,4248.81 ; DATA.A7@2560.15,4286.49 2560.15,4256.38 2567.71,4248.81 ; DATA.B7 2599.52,4260.93 2587.4,4248.81 2567.71,4248.81
  Bottom Layer w10: v1(2551.97,4233.07) 2551.97,4205.51 2575.59,4181.88 2575.59,3988.97 2575.59,3788.18 2599.22,3764.56 U8.5
DP: DATA.A6 DATA.B6 U8.4 | length 783.4
  Top Layer w10: v1(2524.41,4240.94) 2540.46,4256.99 DATA.B6 2540.46,4316.05 2548.03,4323.62 2567.71,4323.62 2579.83,4311.5 DATA.A6
  Bottom Layer w10: v1(2524.41,4240.94) 2524.4,4201.6 2555.9,4170.1 2555.9,3961.4 2555.9,3776.37 2579.52,3752.76 U8.4
DTR: Q1.2 R3.2 U8.28 | length 1331.8
  Top Layer w10: v1(2240.95,3429.92) 2240.95,3465.35 v1(2248.82,3473.22) ; v1(2508.66,3174.01) 2508.66,3158.26 2524.41,3142.52 2524.41,2932.67 2532.28,2924.8 Q1.2 2559.84,2883.46 2520.47,2844.09 2520.47,2796.85 2572.49,2744.83 R3.2
  Bottom Layer w10: v1(2240.95,3429.92) 2240.9,3402.4 2284.3,3359 2284.3,3280.3 2327.6,3237 2378.7,3237 2441.68,3174.01 v1(2508.66,3174.01) ; v1(2248.82,3473.22) 2248.8,3489 2319.7,3559.9 2319.7,3611 2347.3,3638.6 2437.82,3638.6 U8.28
EN: C13.1 EN.1 EN.2 PWR.1 Q2.3 R7.1 U4.3 | length 2054.4
  Top Layer w10: U4.3 2654.4,3937.7 2700,3892.1 2700,3850 2700,3777.95 2733.07,3744.88 v1(2733.07,3508.66) ; v1@2725.2,3284.3 2727,3284.3 EN.2@2727,3230 ; EN.2 2737.01,3220.07 2737.01,2979.93 EN.1 2713.39,2970.08 2651.18,2907.87 2651.18,2892.11 Q2.3 2737.79,2859.84 R7.1 2772.44,2819.68 C13.1
  Top Layer w19.68: U4.3 2654.43,4115.06 2674.01,4134.64 2772.44,4134.64 2800,4162.2 2800,4248.81 2815.74,4264.56 2914.17,4264.56 2931.87,4246.86 PWR.1
  Bottom Layer w10: v1(2725.2,3284.25) 2725.2,3500.79 v1(2733.07,3508.66)
FOC_EN: R1.2 U2.22 U2.24 U2.26 | length 2869.1
  Top Layer w10: U2.22 v1(2441.73,2803.93) ; U2.24 v1(2441.73,2855.12) ; U2.26 v1(2441.73,2906.3)
  Bottom Layer w10: R1.2@2248.8,3857.24 2262.7,3857.24 2272.4,3866.94 2296.1,3866.94 2315.7,3886.64 2315.7,3949.64 2343.3,3977.14 2343.3,4004.74 2280.3,4067.74 2166.1,4067.74 2071.7,3973.24 2071.7,3351.14 2055.9,3335.34 2055.9,3259.84 1950,3153.94 1950,3000.44 2000.8,2949.64 2091.3,2949.64 2170.1,2870.84 2170.1,2685.84 2229.2,2626.74 2372.8,2626.74 2400,2653.94 2400,2723.64 2398.4,2725.24 2398.4,2748.84 2422,2772.44 2457.5,2772.44 2481.1,2796.04 2481.1,2847.24 ; v1(2441.73,2803.93) 2481.1,2843.3 2481.1,2866.93 ; v1(2441.73,2855.12) 2469.29,2855.11 2481.1,2866.93 ; v1(2441.73,2906.3) 2465.35,2906.3 2481.1,2890.55 2481.1,2866.93
FOC_EN_ESP: R1.1 U4.13 | length 323.6
  Top Layer w10: U4.13 2166.1,4042.6 2166.1,3835.4 v1(2197.64,3803.93)
  Bottom Layer w10: v1(2197.64,3803.93) 2207.6,3793.97 R1.1
FOC_IN1: U2.27 U4.12 | length 1647.6
  Top Layer w10: v1(2201.58,3965.35) 2204.43,3968.2 U4.12 ; U2.27 v1(2441.73,2933.86)
  Bottom Layer w10: v1(2201.58,3965.35) 2162.2,3965.3 2130.7,3933.9 2130.7,3327.5 2107.1,3303.9 2107.1,3205.6 2016.5,3115 2016.5,3036.2 2036.2,3016.5 2115,3016.5 2217.3,2914.2 ; 2217.32,2914.17 2378.74,2914.17 2398.42,2933.86 v1(2441.73,2933.86)
FOC_IN2: U2.25 U4.11 | length 1742.5
  Top Layer w10: v1(2252.76,3988.97) 2254.43,3990.64 U4.11 ; U2.25 v1(2441.73,2882.67)
  Bottom Layer w10: v1(2252.76,3988.97) 2154.3,3989 2111,3945.7 2111,3339.3 2087.4,3315.7 2087.4,3217.3 1996.9,3126.8 1996.9,3024.4 2024.4,2996.8 2103.1,2996.8 2205.5,2894.5 2217.3,2894.5 2376.02,2894.49 2382.68,2894.49 2394.49,2882.67 v1(2441.73,2882.67)
FOC_IN3: U2.23 U4.10 | length 1905.1
  Top Layer w10: v1(2300,3992.9) 2304.43,3997.33 U4.10 ; U2.23 v1(2441.73,2831.49)
  Bottom Layer w10: v1@2300,3989 v1(2300,3992.9) 2260.6,4032.3 2166.1,4032.3 2091.3,3957.6 2091.3,3343.3 2071.7,3323.7 2071.7,3237.1 1973.2,3138.6 1973.2,3012.6 2008.7,2977.2 2091.3,2977.2 2193.7,2874.8 2217.3,2874.8 2351.2,2874.8 2394.5,2831.5 v1(2441.73,2831.49)
GND: 3V3.1 5V.1 12V.1 20V.1 BOOT.3 BOOT.4 C1.2 C2.2 C3.1 C4.2 C5.1 C6.2 C7.2 C8.1 C9.2 C13.2 C15.1 C16.1 C17.1 C19.2 C20.2 D2.2 DATA.A1B12 DATA.A12B1 EN.3 EN.4 HALL.1 I1C.4 OLED1.4 PD.A1B12 PD.A12B1 R9.2 R13.2 R19.1 R20.1 R22.2 R24.1 R25.1 SYSFAN1.1 U1.16 U2.6 U2.7 U2.10 U2.12 U2.13 U2.14 U2.20 U2.28 U2.29 U3.3 U4.1 U4.15 U4.38 U4.39 U5.1 U6.1 U7.6 U7.9 U8.3 U8.29 U9.11 | length 4350.3
  Top Layer w10: U4.15 2080.52,3924.99 2107.09,3898.42 2107.09,3689.76 v1@2150.39,3646.45 ; v1(2185.83,3429.92) 2215.75,3400 2250,3400 2279.92,3429.92 v1(2296.06,3429.92) ; v1(2217.32,3264.56) 2280.31,3264.56 v1(2378.74,3264.56) ; U4.39@2507.15,3703.93 2541,3670.07 v1(2559.84,3670.07) ; v1(2587.4,2674.01) 2712.59,2674.01 2780.31,2741.73 C13.2
  Top Layer w11.81: v1(2150.39,3646.45) 2154.33,3650.39 v1(2240.95,3650.39) ; v1(2185.83,3429.92) 2225.2,3469.29 v1(2225.2,3536.22)
  Bottom Layer w10: R24.1 2185.83,3339.37 v1(2185.83,3429.92) ; v3(2200,1850) 2220.47,1829.53 U1.16 ; 2327.56,3323.62 2327.56,3315.74 v1(2378.74,3264.56)
  Bottom Layer w11.81: R24.1 2166.14,3315.74 v1(2217.32,3264.56) ; v1(2225.2,3536.22) 2217.32,3544.1 2217.32,3626.76 v1(2240.95,3650.39)
  Bottom Layer w70.87: v1(1733.07,2630.71) 1823.58,2540.2 2015.7,2540.2 ; 1733.07,3790.7 1733.07,3914.17 1733.07,3925.98 v1(1882.68,4075.59) v1(1985.04,4177.95) ; v1(1733.07,2630.71) v1(1733.1,3013.53) 1733.1,3221.3 v1(1733.1,3440.19) v1(1733.1,3584.19) 1733.1,3790.67 ; 1902.4,2540.2 1965.34,2540.16 v1(2217.32,2540.16) v1(2264.57,2540.16) v1(2303.94,2540.16) ; v1(2303.94,2540.16) v1(2346.03,2540.2) v1(2458.17,2540.2) ; v1(2458.17,2540.2) 2553.9,2636 v1(2587.45,2635.96) ; 2587.4,2681.89 v1(2587.45,2635.96)
  other v1: 2201.58,1599.21 2300,1599.21 2402.36,1599.21 2103.15,1697.64 2500.79,1697.64 1700,2000 1776.38,2032.28 1729.13,2075.59 1800,2099.21 2205.51,2099.21 2402.36,2099.21 2300,2150 1950,2200 2000,2200 2600,2200 2650,2200 2000.79,2244.88 1950,2250 2600,2250 2650,2250 1949.61,2300 2000.79,2300 2603.15,2300 2650,2300 2225.2,2351.18 2252.76,2351.18 2280.32,2351.18 2225.2,2406.3 2252.76,2406.3 2280.32,2406.3 2638.58,2469.29 2666.14,2469.29 2693.7,2469.29 2614.96,2508.66 2614.96,2536.22 2217.32,2563.78 2264.57,2563.78 2303.94,2563.78 2551.97,2646.45 2118.9,2654.33 2233.07,2654.33 2256.69,2654.33 2280.32,2654.33 2303.94,2654.33 2327.56,2654.33 2532.28,2674.01 2512.6,2697.64 2122.84,2729.13 2016.54,2733.07 2449.61,2740.94 2473.23,2740.94 2780.31,2784.25 2114.96,2807.87 2087.4,2819.68 2016.54,2831.49 2114.96,2831.49 2866.93,2843.3 2607.09,2914.17 2780.31,2953.54 2398.43,2985.04 2780.31,3000.78 2843.31,3020.47 2551.97,3028.34 2150.39,3055.9 2650.39,3099.21 2780.31,3099.21 2886.61,3099.21 2878.74,3177.95 2445.67,3237 2752.76,3280.31 2296.06,3406.3 2362.99,3721.26 2670.08,3744.88 2252.76,3752.75 2300,3752.75 2362.99,3756.69 2300,3800 2362.99,3815.74 2607.09,3815.74 2670.08,3815.74 2744.88,3815.74 2400,3850 2508.66,3855.11 2744.88,3902.36 2240.95,3922.04 2453.54,3922.04 2532.28,3922.04 1760.63,4075.59 2850,4099.99 2900,4099.99 1957.48,4150.39 1729.14,4162.2 1756.69,4162.2 1965.36,4174.01 1603.15,4197.63 1906.3,4248.81 2441.73,4248.81 2697.64,4248.81 2162.21,4252.75 1740.95,4260.62 1823.62,4260.62 2250,4299.99 2300,4299.99 2350,4299.99 2250,4399.99 2300,4399.99 2350,4399.99 1950,4449.99 2000,4449.99 2050,4449.99 2100,4449.99
  other v2: 2264.56,2733.06 2303.93,2733.06 2264.56,2772.43 2303.93,2772.43 2264.56,2811.8 2303.93,2811.8 2264.56,2851.17 2303.93,2851.17
HALL: HALL.3 U4.26 | length 750.1
  Top Layer w10: HALL.3 1788.19,3296.46 v1(1788.19,3347.24) ; v1(2028.35,3386.61) 2040.15,3398.42 2142.52,3398.42 2154.43,3386.51 U4.26
  Bottom Layer w10: v1(1788.19,3347.24) 1988.98,3347.24 v1(2028.35,3386.61)
I2C_SCL: I1C.2 OLED1.2 R10.2 U1.7 U4.33 | length 4400.3
  Top Layer w10: I1C.2 1700,3000 1700,3050 1776.77,3126.77 1859.06,3126.77 1878.74,3146.45 v1(1878.74,3201.57) ; v1(2020.47,3292.12) 2020.47,3307.87 2008.66,3319.68 2008.66,3437.79 v1(2012.6,3441.73) 2130.71,3441.73 2177.95,3488.97 2181.89,3492.91 2181.89,3496.85 2181.89,3579.52 2233.07,3630.7 v1(2300,3630.7) ; v1(2264.57,3540.15) 2264.57,3504.73 2331.5,3437.8 2441.7,3437.8 2504.4,3375.1 U4.33 ; v3(2461.42,1835.43) 2524.4,1898.4 2524.4,2339.4 2571.6,2386.6 2571.7,2398.4 2571.7,2532.3 2654.4,2615 2772.5,2615 2863,2705.5 2863,2772.4 2929.9,2839.3 2929.9,3012.6 2859.1,3083.5 2859.1,3166.1 v1(2843.31,3181.89) ; U4.33 2504.43,3304.43 2500,3300 2536.22,3263.78 v1(2536.22,3248.82)
  Bottom Layer w10: OLED1.2 1835.4,3607.1 1784.3,3559.8 1784,3461 1795.39,3449.6 1965.35,3449.6 1973.23,3441.73 v1(2012.6,3441.73) ; v1(1878.74,3201.57) 1953.54,3276.37 2004.72,3276.37 v1(2020.47,3292.12) ; R10.2 2300,3654.33 2300,3579.52 2264.57,3544.09 v1(2264.57,3540.15) ; U1.7 2416.14,1790.16 v3(2461.42,1835.43) ; v1(2536.22,3248.82) 2552,3233.1 2626.8,3233.1 2678,3181.9 v1(2843.31,3181.89)
I2C_SDA: I1C.1 OLED1.1 R14.2 U1.6 U4.36 | length 3965.2
  Top Layer w10: I1C.1 1764.57,3164.56 1764.57,3193.7 1796.06,3225.19 v1(1859.06,3225.19) ; v1(2040.16,3422.04) 2146.45,3422.04 2201.57,3477.16 2201.57,3548.03 2252.75,3599.21 v1(2276.38,3599.21) 2311.81,3599.21 2335.43,3575.59 2492.91,3575.59 2516.53,3551.96 2654.43,3414.07 U4.36 2654.43,3307.77 2677.95,3284.25 v1(2693.7,3284.25) ; v3(2418.11,1835.43) 2500,1917.32 2500,2350 2550,2400 2550,2534.3 2650.3,2634.6 2764.5,2634.6 2835.4,2705.5 2835.4,2776.3 2910.2,2851.1 2910.2,3004.7 2839.4,3075.6 2839.4,3150.4 2815.8,3174 2803.9,3174 v1(2776.38,3201.57)
  Bottom Layer w10: OLED1.1 1859.45,3698.03 1894.49,3666.14 1894,3603 2013,3485 ; v1(1859.06,3225.19) 1874.8,3225.2 1949.6,3300 1996.9,3300 2016.5,3319.7 2028.3,3331.5 2028.3,3347.2 2052,3370.9 2051.97,3414.17 v1(2040.16,3422.04) ; 2012.6,3485.04 2040.16,3457.48 v1(2040.16,3422.04) ; R14.2@2252.75,3599.21 v1(2276.38,3599.21) ; U1.6 2392.51,1809.84 v3(2418.11,1835.43) ; v1(2693.7,3284.25) 2717.32,3260.63 2717.32,3213.38 2729.13,3201.57 2769.77,3201.57 2776.23,3200.4 v1(2776.38,3201.57)
M1: MOTOR.1 U2.5 | length 139
  Top Layer w15.75: MOTOR.1 2072.24,2856.1 U2.5
M2: MOTOR.2 U2.8 | length 129.4
  Top Layer w15.75: MOTOR.2 2049.03,2779.32 U2.8
M3: MOTOR.3 U2.9 | length 156.1
  Top Layer w15.75: MOTOR.3 2113.58,2753.73 U2.9
M_NFAULT: R6.2 U2.18 | length 486.5
  Top Layer w10: U2.18@2397.1,2702.5 2460.4,2702.5 2528.3,2634.6 2528.3,2621.7 2528.3,2426 2480.3,2377.9 R6.2@2429.7,2377.9
M_NRST: R4.2 U2.16 | length 257.7
  Top Layer w10: U2.16 2432.88,2651.37 2488.97,2595.27 2488.97,2520.47 2468.5,2500 R4.2
M_NSLEEP: R5.2 U2.17 | length 371.4
  Top Layer w10: U2.17 2438.78,2676.96 2508.66,2607.08 2508.66,2465.35 2484.25,2440.94 R5.2
PWR_2: PWR.2 R19.2 | length 156.6
  Top Layer w19.68: R19.2 2875.2,4164.16 PWR.2
R2_2: Q1.1 R2.2 | length 725.1
  Top Layer w10: Q1.1 2568.89,2831.49 v1(2654.33,2831.49) ; 2670,3193.7 v1(2670.08,3237) ; 2670.1,3193.7 2670.1,3170.1 2681.9,3158.3 v1(2681.89,3036.82)
  Bottom Layer w10: R2.2 2500.75,3315.75 2555.9,3260.6 2646.48,3260.6 v1(2670.08,3237) ; v1(2654.33,2831.49) 2681.89,2859.05 v1(2681.89,3036.82)
R3_1: Q2.1 R3.1 | length 84.3
  Top Layer w10: R3.1 2697.64,2750.44 Q2.1
R24_2: R23.1 R24.2 | length 126.6
  Top Layer w10: v1(2264.57,3244.88) 2268.51,3240.94 R23.1
  Bottom Layer w10: R24.2 2244.89,3264.61 v1(2264.57,3244.88)
RTS: Q2.2 R2.1 U8.24 | length 970.8
  Top Layer w10: v1@2689.76,3252.75 2689.76,3193.7 2689.76,3174.01 2709.45,3154.33 v1(2709.45,3036.22) ; Q2.2 2735.04,2897.24 v1(2737.01,2895.27)
  Bottom Layer w10: U8.24 2453.5,3516.5 2418.1,3481.1 2402.4,3481.1 2386.6,3465.4 2386.6,3394.5 2398.4,3382.7 2555.9,3382.7 2614.1,3324.5 R2.1 ; R2.1 2626.76,3315.75 v1(2689.76,3252.75) ; v1(2709.45,3036.22) 2709.45,2922.85 v1(2737.01,2895.27)
RX: R16.2 U4.34 U8.26 | length 363.5
  Top Layer w10: v1(2433.86,3555.9) 2414.2,3536.2 2414.2,3520.5 2426,3508.7 2441.3,3508.7 2554.4,3395.6 U4.34
  Bottom Layer w10: R16.2 2416.27,3573.49 v1(2433.86,3555.9) ; v1(2433.86,3555.9) U8.26
S$22797: 
S$22813: 
S$39750: 
S$49787: 
S$49791: 
S$50036: 
TX: R15.2 U4.35 U8.25 | length 372.7
  Top Layer w10: v1(2441.73,3536.22) 2492.91,3536.22 2604.43,3424.7 U4.35
  Bottom Layer w11.81: R15.2 2422.04,3516.53 v1(2441.73,3536.22) U8.25
U2_1: C12.2 U2.1 | length 193.8
  Top Layer w10: U2.1 2213.74,3000.78 v1(2233.07,3000.78)
  Bottom Layer w10: v1(2233.07,3000.78) 2300,3000 2331.5,2968.5 C12.2@2331.5,2965.35
U2_2: C12.1 U2.2 | length 118.4
  Top Layer w10: U2.2 2172.41,2933.86 v1(2229.13,2933.86)
  Bottom Layer w10: v1(2229.13,2933.86) 2260.63,2965.35 C12.1@2276.38,2965.35
U2_3: C18.2 U2.3 | length 178.2
  Top Layer w10: C18.2@2052,3004.7 2071.7,3004.7 2122.8,2953.6 2122.8,2922 2137.6,2907.3 U2.3
U2_15: C5.2 U2.15 | length 343.8
  Top Layer w10: C5.2 2359.45,2309.45 2400,2350 2400,2622.85 U2.15
U5_2: D1.1 U5.2 U5.4 | length 520.4
  Bottom Layer w19.68: U5.2 2575.59,2870.86 2701.43,2745.02 D1.1 ; D1.1 2701.57,2744.88 U5.4
U7_1: C21.2 U7.1 | length 88.2
  Top Layer w19.68: U7.1 2319.68,3067.71 C21.2@2339.4,3083.5
U7_4: R21.1 R23.2 U7.4 | length 162.6
  Top Layer w10: R21.1 2340.66,3179.24 R23.2
  Top Layer w19.68: U7.4 2268.3,3217.5 2307.9,3177.9 R21.1
U7_8: C21.1 D2.1 L1.2 U7.8 | length 628.2
  Top Layer w15: v1(2307.87,3126.77) 2366.92,3126.77 2378.74,3114.95 2378.74,3067.71 C21.1@2339.37,3028.34
  Top Layer w19.68: U7.8 2075.8,3067.5 2115,3028.3 C21.1@2339.4,3028.3
  Bottom Layer w11.81: v1(2307.87,3126.77) 2355.12,3079.52 L1.2
  Bottom Layer w15: D2.1 2264.56,3083.46 v1(2307.87,3126.77)
U8_18: C9.1 U8.18 | length 179.7
  Bottom Layer w10: C9.1@2437.8,3425.98 2453.54,3425.98 2479.52,3400 2561.41,3400 2579.52,3418.1 U8.18
U9_1: C8.2 R18.1 U9.1 | length 241.1
  Top Layer w10: v1(1859.06,4166.14) 1874.8,4181.88 U9.1 1907.59,4180.59 R18.1
  Bottom Layer w10: C8.2 1792.12,4166.14 v1(1859.06,4166.14)
U9_8: R17.1 U9.8 | length 241.8
  Top Layer w10: U9.8 1796.06,4012.59 1819.68,4036.22 1890.55,4036.22 1927.82,4073.48 R17.1
UIO0: U4.37 USER1.1 | length 2254.4
  Top Layer w10: v1(2374.8,3985.03) 2374.8,3886.6 2331.5,3843.3 2331.5,3715 2446.5,3600 2550,3599.99 2700,3450 2700,3350.09 U4.37
  Bottom Layer w10: USER1.1 1632.7,3906.7 1679.5,3953.5 1689.8,3953.5 1969.3,4233.1 2044.1,4233.1 2059.8,4217.3 2477.2,4217.3 2528.3,4166.1 2528.3,4115 ; v1(2374.8,3985.03) 2398.42,4008.66 2477.16,4008.66 2528.34,4059.84 2528.34,4114.95
UIO1: U4.7 USER1.2 | length 1270.2
  Top Layer w10: USER1.2 1680.72,3806.7 1764.57,3890.55 v1(1862.99,3890.55) ; v1(2453.54,4185.82) 2453.54,4118.9 U4.7
  Bottom Layer w10: v1(1862.99,3890.55) 1862.99,3985.03 2075.59,4197.63 2370.86,4197.63 ; 2307.87,4197.63 2370.86,4197.63 ; v1(2453.54,4185.82) 2441.73,4197.63 2370.86,4197.63
UIO2: U4.8 USER1.3 | length 1177.4
  Top Layer w10: USER1.3 1673.62,3780.31 1685.83,3780.31 1764.57,3859.05 v1(1862.99,3859.05) ; v1(2402.36,4177.95) 2404.43,4175.88 U4.8
  Bottom Layer w10: v1(1862.99,3859.05) 1894.49,3890.55 1894.49,3933.9 1894.5,3985 2087.4,4177.9 2370.9,4177.9 ; 2370.86,4177.95 v1(2402.36,4177.95)
UIO3: U4.5 USER2.1 | length 1418.7
  Top Layer w10: USER2.1 1705.51,3712.99 1705.51,3768.5 1768.5,3831.49 v1(1862.99,3831.49) ; v1(2488.98,4158.26) 2524.41,4158.26 2555.9,4126.77 2555.9,4055.8 U4.5
  Bottom Layer w10: v1(1862.99,3831.49) 1910.23,3878.74 1910.23,3969.29 1914.17,3973.22 2099.21,4158.26 2370.86,4158.26 ; 2307.87,4158.26 2370.86,4158.26 ; v1(2488.98,4158.26) 2370.86,4158.26
UIO4: U4.9 USER2.2 | length 1222.2
  Top Layer w10: USER2.2 1600.01,3509.45 1674.01,3583.46 1674.01,3654.32 1725.2,3705.51 1725.2,3756.69 1772.44,3803.93 v1(1862.99,3803.93) ; U4.9 2354.43,4133.95 v1(2355.12,4134.64)
  Bottom Layer w10: v1(1862.99,3803.93) 1925.98,3866.92 1925.98,3953.48 1933.9,3961.4 2111,4138.6 2327.6,4138.6 ; 2327.56,4138.58 2351.18,4138.58 v1(2355.12,4134.64)
UIO5: U4.6 USER2.3 | length 1423.2
  Top Layer w10: USER2.3 1646.46,3453.93 1646.46,3492.91 1701.57,3548.03 1701.57,3642.51 1752.76,3693.7 1752.76,3740.94 1752.75,3756.69 1772.43,3776.37 v1(1862.99,3776.37) ; U4.6@2504.4,4054 v1(2504.72,4111.02)
  Bottom Layer w10: v1(1862.99,3776.37) 1949.61,3862.99 1949.61,3910.23 1949.61,3945.67 1957.48,3953.54 2122.83,4118.89 2307.89,4118.89 2331.5,4118.9 2339.4,4111 v1(2504.72,4111.02)
VFAN: SYSFAN1.2 VFAN.2 | length 454.5
  Bottom Layer w11.81: VFAN.2 1784.3,2815.7 1784.3,3125.6 SYSFAN1.2
VPD: 20V.2 C1.1 C3.2 C4.1 C15.2 C16.2 C18.1 PD.A4B9 PD.A9B4 R17.2 R18.2 U2.4 U2.11 U7.7 | length 3689.5
  Top Layer w19.68: 20V.2 1674.02,4033.87 1674.02,3949.6 1700.22,3923.39 1945.7,3923.39 ; 1945.7,2958.56 2086.32,2958.56 2099.21,2945.67 2099.21,2910.23 2127.76,2881.69 U2.4 ; 1945.7,3003.52 1994.11,3003.52 C18.1@1996.85,3000.78 ; 2075.6,2603.1 2091.3,2618.8 2091.3,2666.2 2127.6,2702.5 U2.11@2171.4,2702.5
  Top Layer w21.65: PD.A9B4 1935.5,4224.2 1950.25,4209.44 2016.55,4209.44 2032.3,4193.7 C16.2 ; C16.2 2124.49,4195.06 PD.A4B9
  Top Layer w23.62: 1945.7,3116.02 2042.59,3116.02 U7.7
  Top Layer w70.87: C3.2 1910.2,2552 1988.97,2551.97 ; 1957.48,2548.03 2048.03,2457.48 C4.1@2174.02,2457.48
  Top Layer w98.42: 2075.6,2603.1 2075.6,2563.8 2059.8,2548 1945.7,2548 1945.7,3969.3 2000,4023.6 2000,4100 2093.7,4193.7 C16.2
VTEMP: C6.1 U3.2 U4.4 | length 345.2
  Top Layer w10: v1(2465.35,3961.41) 2561.41,3961.41 2600,3999.99 2600,4049.9 U4.4
  Bottom Layer w10: C6.1@2343.31,3922.04 2380.71,3959.44 U3.2 2463.38,3959.45 v1(2465.35,3961.41)
pads on no net: DATA. DATA.12 DATA.13 DATA.14 DATA.15 DATA.A8 DATA.B8 PD. PD.12 PD.13 PD.14 PD.15 PD.A6 PD.A7 PD.A8 PD.B6 PD.B7 PD.B8 S1.1 S2.1 S3.1 S4.1 SYSFAN1.3 SYSFAN1.4 U1.1 U1.2 U1.3 U1.4 U1.5 U1.9 U1.10 U1.11 U1.12 U1.15 U1.17 U2.19 U2.21 U4.14 U4.16 U4.17 U4.18 U4.19 U4.20 U4.21 U4.22 U4.23 U4.24 U4.27 U4.28 U4.29 U4.30 U4.31 U4.32 U7.2 U7.3 U7.5 U8.1 U8.2 U8.10 U8.11 U8.12 U8.13 U8.14 U8.15 U8.16 U8.17 U8.19 U8.20 U8.21 U8.22 U8.23 U8.27 U9.2 U9.3 U9.4 U9.5 U9.9 U9.10
copper on no net:
  other v1: 1599.21,2496.85 1689.77,2567.71

## Polygon pours and split planes (outlines as drawn)
GND on Top Layer (solid): 1500,4599.99 3100,4599.99 3100,4099.99 2800,4099.99 2800,3300 3100,3300 3100,1500 1500,1500 1500,4599.99
GND on Bottom Layer (solid): 1500,4599.99 3100,4599.99 3100,4099.99 2800,4099.99 2800,3300 2950,3300 3100,3300 3100,1500 1500,1500

## Keep-outs
Keep-Out Layer:
  circle w10 net S$22797: c1770.99,2329.01 r137.8
  circle w10 net S$22813: c2829.02,2329.01 r137.8
  lines w10: 1550.08,1649.93 ccw(c1650.08,1649.93) 1650.08,1549.93 ; 1550.08,4449.92 cw(c1650.08,4449.92) 1650.08,4549.92 ; 2950.08,1549.93 ccw(c2950.08,1649.93) 3050.08,1649.93 ; 2950.08,4549.92 cw(c2950.08,4449.92) 3050.08,4449.92

## Silkscreen, mask and mechanical layers (free items; w line width, h text height)
Top Overlay:
  circle w10: c1770.99,2329.01 r137.8
  circle w10: c2829.02,2328.86 r137.8
  lines w10: 1925.91,1549.93 cw(c2300.08,1799.93) 2674.24,1549.93 ; 2201.66,1701.5 2201.66,1898.35 2398.5,1898.35 2398.5,1701.5 2201.66,1701.5
  lines w10 net S$50036: 2784.25,2067.72 2984.25,2067.72
  text "HWv1.1" at 2256.69,4477.16 h31.5
  text "GND" at 1697.64,3973.22 h23.62 r90
  text "IO0" at 1660.24,3880.32 h23.62 r330
  text "SDA" at 1902.36,3866.93 h23.62
  text "IO1" at 1660.24,3781.89 h23.62 r330
  text "SCL" at 1902.36,3764.56 h23.62
  text "IO2" at 1660.24,3683.47 h23.62 r330
  text "3V3" at 1902.36,3666.14 h23.62
  text "IO3" at 1660.24,3581.11 h23.62 r330
  text "GND" at 1902.36,3567.71 h23.62
  text "JLCJLCJLCJLC" at 2969.29,3500.78 h39.37 r90
  text "IO4" at 1660.24,3486.62 h23.62 r330
  text "IO5" at 1660.24,3384.26 h23.62 r330
  text "GND" at 1656.3,3285.83 h23.62 r330
  text "3V3" at 1656.3,3191.34 h23.62 r330
  text "HALL" at 1660.24,3088.98 h23.62 r330
  text "12V" at 1925.98,3002.89 h31.5 r30
  text "SDA" at 1656.3,2970.87 h23.62 r330
  text "SCL" at 1656.3,2876.38 h23.62 r330
  text "3V3" at 1656.3,2777.96 h23.62 r330
  text "5V" at 1929.92,2739.11 h31.5 r30
  text "GND" at 1656.3,2683.47 h23.62 r330
  text "SR1 PCB" at 2784.25,2083.46 h62.99
  text "&" at 2911.42,1981.1 h78.74 r180
  text "TMAx" at 2818.9,1980.31 h47.24
  text "Millibyte" at 2818.11,1940.16 h43.31 r356
Bottom Overlay:
  lines w10 net S$49787: 2150,1850 2150,1914.2 2450,1914.2 2450,1850
  lines w10 net S$49791: 2150,1750 2150,1685.8 2450,1685.8 2450,1750
Document:
  lines w10: 1550,2600 3050,2600 ; 1672.72,2328.86 1869.57,2328.86 ; 1771.14,2230.44 1771.14,2427.29 ; 2730.59,2328.86 2927.44,2328.86 ; 2829.02,2230.44 2829.02,2427.29
  lines w10 net S$39750: 2000.79,1929.92 2536.22,1929.92